# EAGLE board amplifier (EAGLE 6.5.0)
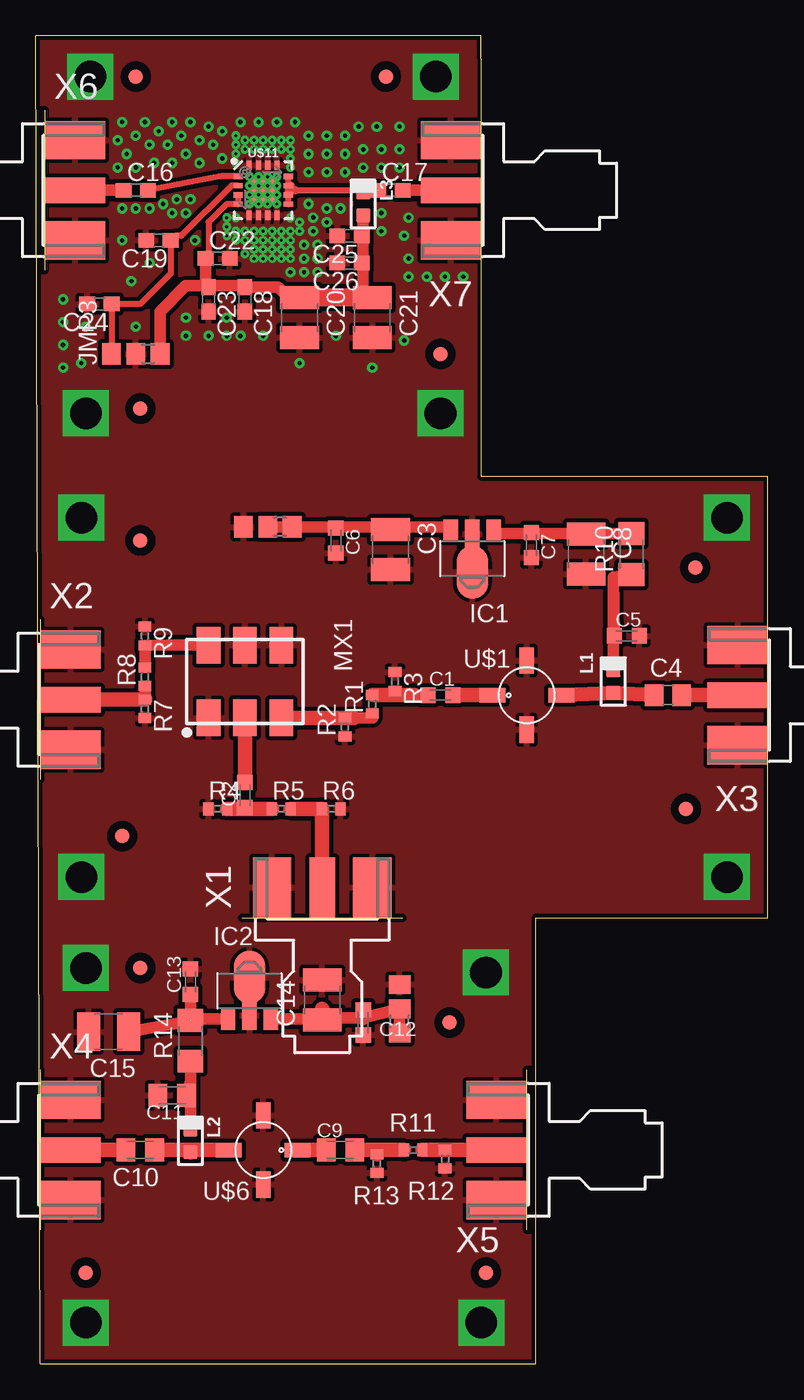
[diagram p0: board, top side]
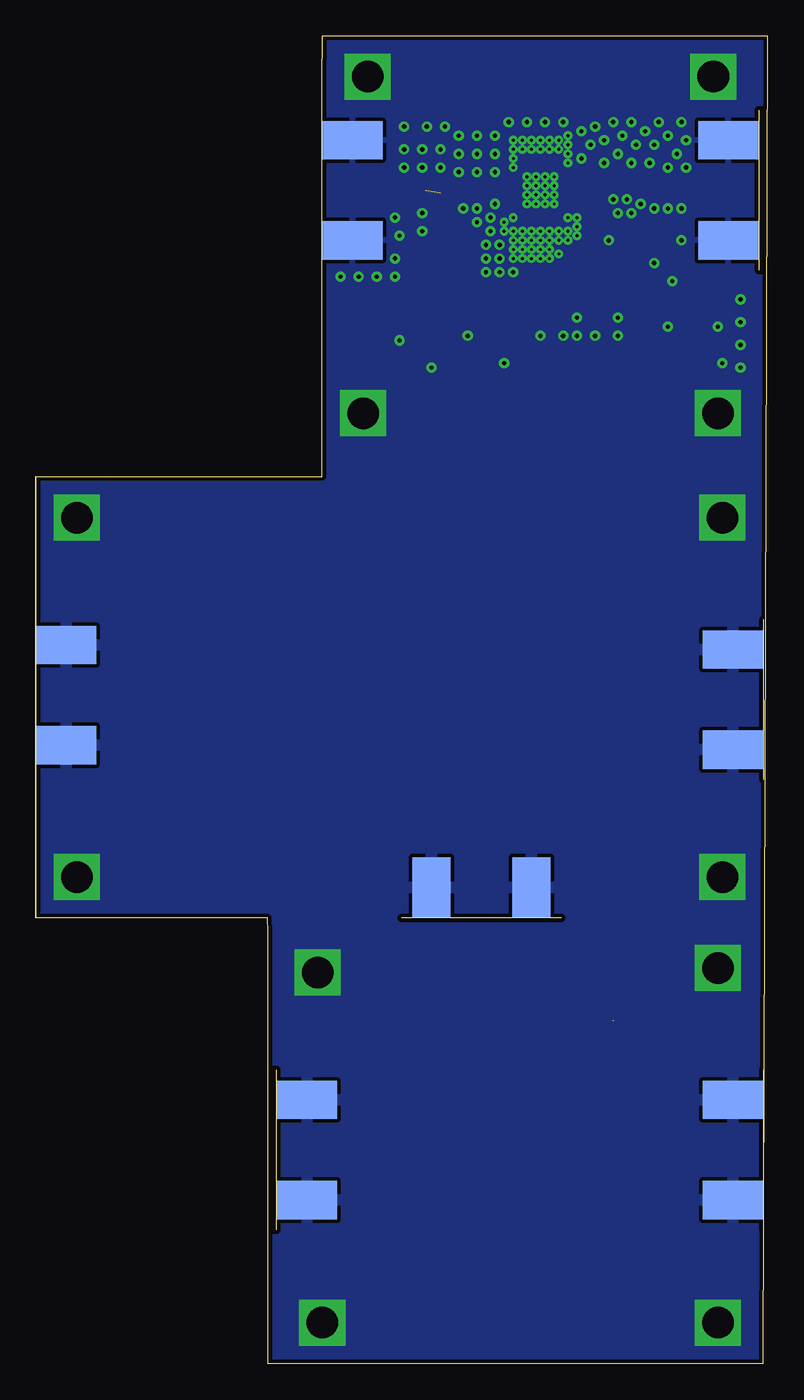
[diagram p1: board, bottom side, seen from below]

Size 51.12 x 92.7 mm. Coordinates in mm from the lower left corner, seen from the top.
Outline: 51.1,31.11 51.12,31.11 51.12,61.91 31.11,61.91 31.11,89.53 31.09,92.7 0,92.7 0.32,0 34.91,0 34.91,30.14 34.93,31.11 51.1,31.11
Outline: 51.1,31.11 51.1,61.9
Outline: 30.78,92.7 2.86,92.7
Copper layers (1*16): Top 0.035mm / dielectric 1.5mm / Bottom 0.035mm
Design rules "default *": minimum track width 10mil, minimum drill 24mil, track to track 0.3mm, track to pad 0.3mm, pad to pad 0.3mm, via to via 0.3mm, smd to smd 0.3mm, copper to edge 0.3mm, drill to drill 8mil, minimum pad ring 10mil, minimum via ring 8mil, stop-mask expansion 4mil, vias tented up to drill 1mm, thermal gap 10mil

## Footprints (pad centres in the part's own frame; a part is rotated, then mirrored left to right if it is on the bottom)
C0603K = smd 1.05 x 1.08: 1 -0.875,0; 2 0.875,0
C1210 = smd 1.6 x 2.7: 1 -1.4,0; 2 1.4,0
C0805 = smd 1.3 x 1.5: 1 -0.95,0; 2 0.95,0
C0805K = smd 1.3 x 1.6: 1 -1,0; 2 1,0
C0603 = smd 1.1 x 1: 1 -0.85,0; 2 0.85,0
SOT89 = smd 1 x 1.5: 1 -1.499,-1.981; 3 1.499,-1.981 | smd 1 x 2: 2 0,-1.727 | smd 2.2 x 3.7: 2@1 0,0.94
A0R-JMP = smd 1.5 x 1.3: 1 0,1.7; 2 0,0; 3 0,-1.7
B0R-JMP = smd 1.5 x 1.3: 1 0,1.7; 2 0,0; 3 0,-1.7
0603 = smd 0.95 x 1: 1 -0.8,0; 2 0.8,0
CD636 = smd 1.651 x 2.54: 1 -2.54,-2.54; 2 0,-2.54; 3 2.54,-2.54; 4 2.54,2.54; 5 0,2.54; 6 -2.54,2.54
R1005 = smd 0.7 x 0.9: 1 -0.65,0; 2 0.65,0
R1206 = smd 1.6 x 1.803: 1 -1.422,0; 2 1.422,0
MAR4SM = smd 1.016 x 1.829: 1 0,-2.413; 3 0,2.413 | smd 1.829 x 1.016: 2 2.413,0; 4 -2.413,0
FIDUCIAL_1MM = smd 1 x 1: 1 0,0
LFCSP-16-4X4 = smd 1.75 x 1.75: 0 0,0 | smd 0.65 x 0.37: 1 -1.75,0.975; 2 -1.75,0.325; 3 -1.75,-0.325; 4 -1.75,-0.975; 9 1.75,-0.975; 10 1.75,-0.325; 11 1.75,0.325; 12 1.75,0.975 | smd 0.37 x 0.65: 5 -0.975,-1.75; 6 -0.325,-1.75; 7 0.325,-1.75; 8 0.975,-1.75; 13 0.975,1.75; 14 0.325,1.75; 15 -0.325,1.75; 16 -0.975,1.75
J502-ND-142-0711-821/826 = smd 4.191 x 1.778: 1 2.115,0 | smd 4.191 x 2.667: G@1 2.115,3.495; G@2 2.115,-3.495 | smd 4.191 x 2.667 bottom: G@3 2.115,3.495; G@4 2.115,-3.495

## Placement (x,y rotation side)
C1  [C0603K]  28.26,46.67 0 top
C2  [C0603K]  14.61,39.69 90 top
C3  [C1210]  24.77,56.83 270 top
C4  [C0805]  44.13,46.67 0 top
C5  [C0603K]  41.28,50.8 0 top
C6  [C0603K]  20.95,57.47 270 top
C7  [C0603K]  34.61,57.15 270 top
C8  [C1210]  38.42,56.52 270 top
C9  [C0805K]  21.27,14.92 180 top
C10  [C0805K]  7.3,14.92 180 top
C11  [C0805K]  9.53,18.73 180 top
C12  [C0603K]  22.86,23.81 270 top
C13  [C0603K]  10.79,26.67 90 top
C14  [C1210]  20,25.4 90 top
C15  [C1210]  5.08,23.18 180 top
C16  [C0603]  6.98,81.91 0 top
C17  [C0603]  24.77,81.91 0 top
C18  100n  [C0603]  14.61,74.3 270 top
C19  100p  [C0603]  8.57,78.42 180 top
C20  10u  [C1210]  18.41,73.02 270 top
C21  10u  [C1210]  23.5,73.02 270 top
C22  100p  [C0603]  12.7,77.15 0 top
C23  1n  [C0603]  12.06,74.3 270 top
C24  100n  [C0603]  4.45,73.98 180 top
C25  100p  [C0603]  21.91,78.74 180 top
C26  100n  [C0603]  21.91,76.83 180 top
IC1  78L08F  [SOT89]  30.48,56.2 180 top
IC2  78L08F  [SOT89]  14.92,26.04 0 top
JMP1  0R-JUMPA  [A0R-JMP]  16.19,58.42 270 top
JMP2  0R-JUMPA  [A0R-JMP]  25.4,24.76 180 top
JMP3  0R-JUMPB  [B0R-JMP]  6.98,70.48 90 top
L1  [0603]  40.32,47.62 270 top
L2  [0603]  10.79,15.56 270 top
L3  [0603]  22.86,80.96 270 top
MX1  ADE-1  [CD636]  14.61,47.62 0 top
R1  [R1005]  23.5,46.04 90 top
R2  [R1005]  21.59,44.45 90 top
R3  [R1005]  25.08,47.62 270 top
R4  [R1005]  12.7,38.73 0 top
R5  [R1005]  17.14,38.73 0 top
R6  [R1005]  20.64,38.73 0 top
R7  [R1005]  7.62,45.72 270 top
R8  [R1005]  7.62,47.94 90 top
R9  [R1005]  7.62,50.8 270 top
R10  [R1206]  41.59,56.52 90 top
R11  [R1005]  26.35,14.92 180 top
R12  [R1005]  28.57,14.29 90 top
R13  [R1005]  23.81,13.97 90 top
R14  [R1206]  10.79,22.54 90 top
U$1  ERA  [MAR4SM]  34.29,46.67 270 top
U$2  FIDUCIAL  [FIDUCIAL_1MM]  46.04,55.56 0 top
U$3  FIDUCIAL  [FIDUCIAL_1MM]  45.4,38.73 0 top
U$4  FIDUCIAL  [FIDUCIAL_1MM]  6.03,36.83 0 top
U$5  FIDUCIAL  [FIDUCIAL_1MM]  7.3,57.47 0 top
U$6  ERA  [MAR4SM]  15.88,14.92 90 top
U$7  FIDUCIAL  [FIDUCIAL_1MM]  31.43,6.35 0 top
U$8  FIDUCIAL  [FIDUCIAL_1MM]  7.3,27.62 0 top
U$9  FIDUCIAL  [FIDUCIAL_1MM]  28.89,23.81 0 top
U$10  FIDUCIAL  [FIDUCIAL_1MM]  3.49,6.35 0 top
U$11  ADL5606  [LFCSP-16-4X4]  15.88,81.91 0 top
U$12  FIDUCIAL  [FIDUCIAL_1MM]  24.45,89.85 0 top
U$13  FIDUCIAL  [FIDUCIAL_1MM]  7.3,66.67 0 top
U$14  FIDUCIAL  [FIDUCIAL_1MM]  28.26,70.48 0 top
U$15  FIDUCIAL  [FIDUCIAL_1MM]  6.98,89.85 0 top
X1  [J502-ND-142-0711-821/826]  20,31.11 90 top
X2  [J502-ND-142-0711-821/826]  0.32,46.36 0 top
X3  [J502-ND-142-0711-821/826]  51.12,46.67 180 top
X4  [J502-ND-142-0711-821/826]  0.32,14.92 0 top
X5  [J502-ND-142-0711-821/826]  34.29,14.92 180 top
X6  [J502-ND-142-0711-821/826]  0.64,81.91 0 top
X7  [J502-ND-142-0711-821/826]  31.11,81.91 180 top

## Library data of the parts
C1-C26 R1-R14 = rcl
IC1 IC2 = linear
JMP1-JMP3 = jump-0r-smd
L1-L3 = aditya_main
MX1 = minickts (2)
U$1 U$6 = lasser
U$2-U$5 U$7-U$10 = adafruit
U$11 = untitled
U$12-U$15 = tracker (2)
X1-X7 = con-coax; MF: JOHNSON COMPONENTS; MPN: 142-0711-821; OC_FARNELL: 1019328; OC_NEWARK: 16F3627

## Nets
GND: C11.2 C12.2 C13.2 C14.2 C15.2 IC2.2 IC2.2@1 JMP2.3 R12.1 R13.1 U$6.2 U$6.4 X4.G@1 X4.G@2 X4.G@3 X4.G@4 X5.G@1 X5.G@2 X5.G@3 X5.G@4
GND1: C3.2 C5.2 C6.2 C7.2 C8.2 IC1.2 IC1.2@1 JMP1.3 MX1.1 MX1.4 MX1.5 R2.1 R3.1 R4.1 R6.2 R7.2 R9.1 U$1.2 U$1.4 X1.G@1 X1.G@2 X1.G@3 X1.G@4 X2.G@1 X2.G@2 X2.G@3 X2.G@4 X3.G@1 X3.G@2 X3.G@3 X3.G@4
GND2: C18.2 C19.2 C20.2 C21.2 C22.2 C23.2 C24.2 C25.2 C26.2 JMP3.2 U$11.0 U$11.5 U$11.6 U$11.7 U$11.8 U$11.13 U$11.14 U$11.15 U$11.16 X6.G@1 X6.G@2 X6.G@3 X6.G@4 X7.G@1 X7.G@2 X7.G@3 X7.G@4
N$1: C2.1 R4.2 R5.1
N$2: R5.2 R6.1 X1.1
N$3: C2.2 MX1.2
N$4: C4.1 L1.2 U$1.3
N$5: C1.2 U$1.1
N$6: C1.1 R1.2 R3.2
N$7: MX1.3 R1.1 R2.2
N$8: R7.1 R8.1 X2.1
N$9: MX1.6 R8.2 R9.2
N$10: C5.1 L1.1 R10.1
N$11: C4.2 X3.1
N$12: C7.1 C8.1 IC1.1 R10.2
N$13: C3.1 C6.1 IC1.3 JMP1.1 JMP1.2
N$14: C10.1 L2.2 U$6.3
N$15: C9.2 U$6.1
N$16: C9.1 R11.2 R13.2
N$17: R11.1 R12.2 X5.1
N$18: C11.1 L2.1 R14.1
N$19: C10.2 X4.1
N$20: C13.1 C15.1 IC2.1 R14.2
N$21: C12.1 C14.1 IC2.3 JMP2.1 JMP2.2
N$22: C19.1 C24.1 JMP3.1 U$11.2
N$23: C18.1 C20.1 C21.1 C22.1 C23.1 C25.1 C26.1 JMP3.3 L3.2 U$11.3 U$11.4
N$24: C16.1 X6.1
N$25: C17.1 L3.1 U$11.9 U$11.10 U$11.11 U$11.12
N$26: C17.2 X7.1
N$27: C16.2 U$11.1

## Tracks (layer width: path | path; a pad name or v marks a point on that pad's centre or on a via)
GND  (via drill 2.2)
  other vias: 3.49,27.62 3.49,2.86 31.43,27.3 31.11,2.86
  pour Top: -1.59,32.07 35.24,30.8 35.88,-1.27 -1.27,-1.27
  pour Bottom: -1.27,31.43 34.93,30.48 35.24,-0.64 -1.27,-0.64
GND1  (via drill 2.2)
  other vias: 3.17,59.05 3.17,33.97 48.26,33.97 48.26,59.05
  pour Top: -1.9,62.87 52.07,62.87 52.71,30.8 -0.64,31.11
  pour Bottom: 0,63.82 52.07,62.87 52.07,30.48 0,31.75
GND2  (via drill 0.2 pad 0.41, 0.3, 2.2)
  other vias: 3.81,89.85 27.94,89.85 23.5,69.53 28.26,66.36 3.49,66.36 6.03,78.42 14.61,84.77 14.92,82.87 15.56,82.87 16.19,82.87 16.83,82.87 16.83,82.23 16.83,81.6 16.83,80.96 16.19,80.96 16.19,81.6 16.19,82.23 14.92,82.23 15.56,82.23 14.92,81.6 14.92,80.96 15.56,80.96 15.56,81.6 13.97,83.82 13.97,84.45 15.24,84.77 15.88,84.77 16.51,84.77 17.14,84.77 17.14,85.41 16.51,85.41 15.88,85.41 15.24,85.41 14.61,85.41 13.97,85.09 18.41,79.69 13.97,80.01 17.78,80.01 17.78,79.06 17.14,79.06 16.51,79.06 15.88,79.06 15.24,79.06 14.61,79.06 13.97,79.06 15.24,78.42 15.24,77.79 16.51,78.42 17.14,78.42 17.78,78.42 17.78,77.79 17.14,77.79 16.51,77.79 17.78,84.77 17.78,85.41 17.78,84.14 17.78,83.5 15.88,78.42 15.88,77.79 15.24,77.15 15.88,77.15 16.51,77.15 17.14,77.15 17.78,77.15 13.33,79.38 13.33,80.01 13.97,85.72 9.53,80.33 9.84,81.28 10.79,81.28 13.02,84.14 11.43,83.82 9.53,83.82 5.71,83.5 6.98,83.5 8.26,83.82 6.03,80.64 6.98,80.64 7.94,80.64 8.89,80.96 10.48,80.33 11.11,78.42 13.33,78.74 14.61,78.42 13.97,78.42 14.61,77.47 18.41,79.06 1.91,74.3 1.91,72.71 1.91,71.12 1.91,69.53 3.17,69.85 18.41,69.85 20.95,71.75 15.88,71.75 25.72,71.44 14.29,71.75 13.33,73.02 13.33,71.75 12.06,71.75 10.48,73.02 6.98,72.39 25.72,78.74 10.48,84.45 6.35,84.45 12.38,85.09 13.02,86.04 11.43,85.41 9.21,85.09 7.94,85.09 5.71,85.41 6.98,85.72 6.03,86.68 8.57,86.04 10.16,85.72 7.62,86.68 9.53,86.68 10.79,86.68 12.06,86.36 14.29,86.68 15.56,86.68 16.83,86.68 18.1,86.68 19.05,85.72 19.05,84.45 19.05,83.18 20.32,83.18 20.32,84.45 20.32,85.72 21.59,85.72 21.59,84.45 21.59,83.18 22.86,83.5 24.13,83.5 25.4,83.5 22.86,84.77 24.13,84.77 25.4,84.77 25.4,86.36 23.81,86.36 22.54,86.36 19.05,80.96 18.73,77.15 21.27,80.64 20.32,80.64 24.13,80.33 24.13,79.06 19.68,78.1 20.32,79.69 18.73,78.1 19.37,79.06 19.37,80.01 26.04,80.01 26.04,77.15 26.04,75.88 27.3,75.88 28.57,75.88 29.84,75.88 19.68,77.15 19.68,76.2 18.73,76.2 17.78,76.2 6.67,75.56 7.94,76.83 3.49,72.39 10.48,71.75
  pour Top: 33.34,93.34 32.07,62.23 -1.27,62.23 -1.27,94.3
  pour Bottom: 0.32,93.66 33.34,93.66 32.07,62.23 0,61.59
N$1
  Top 0.813: R4.2 C2.1
  Top 1.016: R5.1 R4.2
N$2
  Top 1.016: R5.2 R6.1 X1.1
N$3
  Top 1.016: C2.2 MX1.2
N$4
  Top 0.813: U$1.3 36.83,46.67 | L1.2
  Top 1.016: 36.83,46.67 L1.2 | L1.2 C4.1
N$5
  Top 1.016: C1.2 U$1.1
N$6
  Top 0.813: 26.43,46.69 C1.1 | R3.2 25.08,46.69
  Top 1.016: R1.2 25.08,46.69 26.43,46.69
N$7
  Top 0.813: R1.1 23.5,45.09 22.22,45.09 R2.2
  Top 1.016: MX1.3 22.22,45.09
N$8
  Top 0.813: R7.1 R8.1 | R7.1 6.03,46.36
  Top 1.016: X2.1 6.03,46.36 R7.1
N$9
  Top 0.813: MX1.6 9.21,50.16 R9.2 R8.2
N$10
  Top 0.813: L1.1 40.32,54.93 | 40.32,54.93 R10.1 | C5.1 40.32,54.93
N$11
  Top 1.016: C4.2 X3.1
N$12
  Top 0.813: R10.2 38.42,57.94 | 38.42,57.94 34.61,57.94 | IC1.1 31.98,57.94 34.61,57.94 | 34.61,57.94 C7.1 | C8.1 38.42,57.94
N$13
  Top 0.813: JMP1.2 JMP1.1 20.64,58.42 | 20.64,58.42 24.45,58.42 | 24.45,58.42 28.98,58.42 IC1.3 | C3.1 24.45,58.23 24.45,58.42 | C6.1 20.64,58.34 20.64,58.42
N$14
  Top 1.016: C10.1 10.48,14.92 | 10.48,14.92 U$6.3 | L2.2 10.48,14.92
N$15
  Top 1.016: U$6.1 C9.2
N$16
  Top 1.016: R11.2 23.81,14.92 | 23.81,14.92 C9.1 | R13.2 23.81,14.92
N$17
  Top 1.016: R12.2 30.16,14.94 | 30.16,14.94 32.49,14.62 X5.1 | R11.1 29.53,14.92 30.16,14.94
N$18
  Top 0.813: L2.1 10.79,19.68 | 10.79,19.68 R14.1 | C11.1 10.79,19.68
N$19
  Top 1.016: X4.1 C10.2
N$20  (1 unrouted)
  Top 0.813: IC2.1 10.79,24.05 | 10.79,24.05 C13.1 | C15.1 10.79,23.94 10.79,24.05
N$21
  Top 0.813: IC2.3 19.68,24.05 | 19.68,24.05 20.64,23.74 20.64,24.13 | JMP2.1 JMP2.2 22.86,24.13 20.64,24.13 | 20.64,24.13 20.32,24.13 19.68,24.05
  Top 1.016: C12.1 22.86,24.13 | 20.32,24.13 20,24.76 C14.1
N$22
  Top 0.406: U$11.2 13.66,82.24 10.16,78.74 9.74,78.74 C19.1 9.42,76.1 7.3,73.98 C24.1 5.29,70.49 JMP3.1
N$23
  Top 0.406: U$11.3 U$11.4 13.31,80.94 12.06,79.69 12.06,77.37 C22.1 | 22.86,78.84 C25.1 | C26.1 22.86,76.83
  Top 0.813: JMP3.3 8.69,73.45 10.48,75.25 12.06,75.25 | 12.06,75.25 14.5,75.25 C18.1 16.93,75.14 17.78,74.3 18.29,74.3 C20.1 | C22.1 11.85,75.36 C23.1 12.06,75.25 | 22.86,74.42 22.86,76.83 22.86,78.84 L3.2
  Top 1.27: C21.1 22.86,74.42 C20.1
N$24
  Top 0.813: C16.1 X6.1
N$25  (1 unrouted)
  Top 0.406: U$11.12 U$11.11 | U$11.9 U$11.10 U$11.11 | U$11.11 17.77,82.24 17.78,82.23 | 17.78,82.24 17.78,81.91 | 18.1,81.91 C17.1
  Top 0.61: U$11.11 17.78,82.24 | 17.78,81.91 18.1,81.91
N$26
  Top 0.813: C17.2 X7.1
N$27
  Top 0.406: U$11.1 12.94,82.89 C16.2

## Text on the board
tStop: POWER AMP | LA3PNA 2019 | Upconverter | LA3PNA 2019 | Amplifier | LA3PNA 2019